# EAGLE board 32IV-4_Moded-infrared (EAGLE 9.7.0)

Size 101.74 x 110.13 mm. Coordinates in mm from the lower left corner, seen from the top.
Outline: 0,0 101.74,0 101.74,110.13 0,110.13 0,0
Copper layers (1*16): Top 0.035mm / dielectric 1.5mm / Bottom 0.035mm
Design rules "default": minimum track width 6mil, minimum drill 0.35mm, track to track 6mil, track to pad 6mil, pad to pad 6mil, via to via 6mil, smd to smd 6mil, copper to edge 40mil, drill to drill 6mil, minimum pad ring 10mil, minimum via ring 8mil, stop-mask expansion 4mil, vias tented up to drill 0mil, thermal gap 10mil

## Footprints (pad centres in the part's own frame; a part is rotated, then mirrored left to right if it is on the bottom)
LEDRD254W60D565H860B_G = drill 0.981 pad 1.581: 1 -1.27,0; 2 1.27,0
LEDRD254W60D565H860B_O = drill 0.981 pad 1.581: 1 -1.27,0; 2 1.27,0
LEDRD254W60D565H860B = drill 0.981 pad 1.581: 1 -1.27,0; 2 1.27,0
LEDRD254W60D565H860B_Y = drill 0.981 pad 1.581: 1 -1.27,0; 2 1.27,0
LEDRD254W60D565H860B_B = drill 0.981 pad 1.581: 1 -1.27,0; 2 1.27,0
LEDRD254W60D565H860B_W = drill 0.981 pad 1.581: 1 -1.27,0; 2 1.27,0
RESAD1016W63L850D250B = drill 0.83 pad 1.43: 1 -5.08,0; 2 5.08,0
ARDUINO-UNO-R3-SHIELD = drill 1.016 pad 1.88: 3.3V 24.13,-2.54; 5V 24.13,0; A0 24.13,12.7; A1 24.13,15.24; A2 24.13,17.78; A3 24.13,20.32; A4 24.13,22.86; A5 24.13,25.4; AREF -24.13,-13.97; D2 -24.13,20.32; D3 -24.13,17.78; D4 -24.13,15.24; D5 -24.13,12.7; D6 -24.13,10.16; D7 -24.13,7.62; D8 -24.13,3.81; D9 -24.13,1.27; D10 -24.13,-1.27; D11 -24.13,-3.81; D12 -24.13,-6.35; D13 -24.13,-8.89; GND@0 24.13,2.54; GND@1 24.13,5.08; GND@2 -24.13,-11.43; IOREF 24.13,-7.62; NC 24.13,-10.16; RES 24.13,-5.08; RX -24.13,25.4; SCL -24.13,-19.05; SDA -24.13,-16.51; TX -24.13,22.86; VIN 24.13,7.62
TSOP48 = drill 0.8: 1 -2.54,0; 2 0,0; 3 2.54,0

## Placement (x,y rotation side)
D1  GREEN  [LEDRD254W60D565H860B_G]  33.14,102.22 180 top
D2  ORANGE  [LEDRD254W60D565H860B_O]  40.76,102.22 180 top
D3  RED  [LEDRD254W60D565H860B]  48.38,102.22 180 top
D4  YELLOW  [LEDRD254W60D565H860B_Y]  61.08,102.22 180 top
D5  BLUE  [LEDRD254W60D565H860B_B]  68.7,102.22 180 top
D6  WHITE  [LEDRD254W60D565H860B_W]  76.32,102.22 180 top
R1  220  [RESAD1016W63L850D250B]  75.05,94.6 90 top
R7  220  [RESAD1016W63L850D250B]  67.43,94.6 90 top
R8  220  [RESAD1016W63L850D250B]  59.81,94.6 90 top
R9  220  [RESAD1016W63L850D250B]  47.11,94.6 90 top
R10  220  [RESAD1016W63L850D250B]  39.49,94.6 90 top
R11  220  [RESAD1016W63L850D250B]  31.87,94.6 90 top
U1  ARDUINO-UNO-R3-SHIELD  [ARDUINO-UNO-R3-SHIELD]  47.88,29.84 270 top
U2  IR-RECEIVERTSOP48  [TSOP48]  95.37,102.22 0 top

## Library data of the parts
D1 = Tinkercad; CATEGORY: Opto-Electronic; SUB-CATEGORY: LED; VALUE: LED_GREEN
D2 = Tinkercad; CATEGORY: Opto-Electronic; SUB-CATEGORY: LED; VALUE: LED_ORANGE
D3 = Tinkercad; CATEGORY: Opto-Electronic; SUB-CATEGORY: LED; VALUE: LED_RED
D4 = Tinkercad; CATEGORY: Opto-Electronic; SUB-CATEGORY: LED; VALUE: LED_YELLOW
D5 = Tinkercad; CATEGORY: Opto-Electronic; SUB-CATEGORY: LED; VALUE: LED_BLUE
D6 = Tinkercad; CATEGORY: Opto-Electronic; SUB-CATEGORY: LED; VALUE: LED_WHITE
R1 R7-R11 U1 U2 = Tinkercad

## Nets
D1_C: D1.2 R11.2
D2_C: D2.2 R10.2
D3_C: D3.2 R9.2
D4_C: D4.2 R8.2
D5_C: D5.2 R7.2
D6_C: D6.2 R1.2
U1_5V: U1.5V U2.3
U1_D3: U1.D3 U2.1
U1_D8: D6.1 U1.D8
U1_D9: D5.1 U1.D9
U1_D10: D4.1 U1.D10
U1_D11: D3.1 U1.D11
U1_D12: D2.1 U1.D12
U1_D13: D1.1 U1.D13
U1_GND: R1.1 R7.1 R8.1 R9.1 R10.1 R11.1 U1.GND@0 U1.GND@1 U1.GND@2 U2.2

## Tracks (layer width: path | path; a pad name or v marks a point on that pad's centre or on a via)
D1_C  (1 unrouted)
D2_C  (1 unrouted)
D3_C  (1 unrouted)
D4_C  (1 unrouted)
D5_C  (1 unrouted)
D6_C  (1 unrouted)
U1_5V  (1 unrouted)
U1_D3  (1 unrouted)
U1_D8  (1 unrouted)
U1_D9  (1 unrouted)
U1_D10  (1 unrouted)
U1_D11  (1 unrouted)
U1_D12  (1 unrouted)
U1_D13  (1 unrouted)
U1_GND  (9 unrouted)